# EAGLE board CT_schematic (EAGLE 7.6.0)

Size 100 x 80 mm. Coordinates in mm from the lower left corner, seen from the top.
Outline: 0,0 100,0 100,80 0,80 0,0
Copper layers (1*16): Top 0.035mm / dielectric 1.5mm / Bottom 0.035mm
Design rules "default": minimum track width 10mil, minimum drill 24mil, track to track 8mil, track to pad 8mil, pad to pad 8mil, via to via 8mil, smd to smd 8mil, copper to edge 40mil, drill to drill 8mil, minimum pad ring 10mil, minimum via ring 8mil, stop-mask expansion 4mil, vias tented up to drill 0mil, thermal gap 10mil

## Footprints (pad centres in the part's own frame; a part is rotated, then mirrored left to right if it is on the bottom)
C0603 = smd 0.8 x 0.8: 1 -0.762,0; 2 0.762,0
C0402 = smd 0.5 x 0.5: 1 -0.508,0; 2 0.508,0
C1210 = smd 1.2 x 2.5: 1 -1.524,0; 2 1.524,0
EXV-9H = smd 3.505 x 1.676: 1 -2.857,0; 2 2.857,0
L0603 = smd 0.8 x 0.8: 1 -0.762,0; 2 0.762,0
PJ-037B_PACKAGE = drill 3.7 square: 1 12,0 | drill 3.2 square: 2 6,0
R0603 = smd 0.8 x 0.8: 1 -0.762,0; 2 0.762,0
LQFP48 = smd 0.3 x 1.2: 1 -2.75,-4.25; 2 -2.25,-4.25; 3 -1.75,-4.25; 4 -1.25,-4.25; 5 -0.75,-4.25; 6 -0.25,-4.25; 7 0.25,-4.25; 8 0.75,-4.25; 9 1.25,-4.25; 10 1.75,-4.25; 11 2.25,-4.25; 12 2.75,-4.25; 25 2.75,4.25; 26 2.25,4.25; 27 1.75,4.25; 28 1.25,4.25; 29 0.75,4.25; 30 0.25,4.25; 31 -0.25,4.25; 32 -0.75,4.25; 33 -1.25,4.25; 34 -1.75,4.25; 35 -2.25,4.25; 36 -2.75,4.25 | smd 1.2 x 0.3: 13 4.25,-2.75; 14 4.25,-2.25; 15 4.25,-1.75; 16 4.25,-1.25; 17 4.25,-0.75; 18 4.25,-0.25; 19 4.25,0.25; 20 4.25,0.75; 21 4.25,1.25; 22 4.25,1.75; 23 4.25,2.25; 24 4.25,2.75; 37 -4.25,2.75; 38 -4.25,2.25; 39 -4.25,1.75; 40 -4.25,1.25; 41 -4.25,0.75; 42 -4.25,0.25; 43 -4.25,-0.25; 44 -4.25,-0.75; 45 -4.25,-1.25; 46 -4.25,-1.75; 47 -4.25,-2.25; 48 -4.25,-2.75
TSC2014IYZGT = smd 0.3 x 0.3: A1 0,0; A2 0.5,0; A3 1,0; B1 0,-0.5; B2 0.5,-0.5; B3 1,-0.5; C1 0,-1; C2 0.5,-1; C3 1,-1; D1 0,-1.5; D2 0.5,-1.5; D3 1,-1.5
HTSS-105-01-G-D = drill 1 pad 1.8 square: 1 0,0 | drill 1 pad 1.8: 2 0,2.54; 3 2.54,0; 4 2.54,2.54; 5 5.08,0; 6 5.08,2.54; 7 7.62,0; 8 7.62,2.54; 9 10.16,0; 10 10.16,2.54
ABLS-25.000MHZ-B2F-T = smd 5.6 x 2.8: 1 -3.81,0; 2 5.69,0
ASEK = smd 1.4 x 1: 1 -1.1,-0.8; 2 1.1,-0.8; 3 1.1,0.8; 4 -1.1,0.8
SOIC-8_EP = smd 1.6 x 0.533: 1 -2.921,1.905; 2 -2.921,0.635; 3 -2.921,-0.635; 4 -2.921,-1.905; 5 2.921,-1.905; 6 2.921,-0.635; 7 2.921,0.635; 8 2.921,1.905 | smd 2.54 x 3.302: EPAD 0,0 | drill 0.406 pad 0.406: P$1 -0.508,0.635; P$2 0.381,0.635; P$3 -0.508,-0.635; P$4 0.381,-0.635
SON-6 = smd 0.55 x 0.3: 1 -0.355,0.5 | smd 0.52 x 0.3: 2 -0.37,0; 3 -0.37,-0.5; 4 0.37,-0.5; 5 0.37,0; 6 0.37,0.5
SW_4-1437565-2 = smd 1.4 x 2.1: 1 -2.23,4.55; 2 -2.23,-4.55; 3 2.23,4.55; 4 2.23,-4.55
LGM67K-G1J2-24-Z = smd 0.8 x 1.4: A -2,0; C 0,0
NC7SZ125M5X = smd 1.3 x 0.7: 1 -1.3,0.95; 2 -1.3,0; 3 -1.3,-0.95; 4 1.3,-0.95; 5 1.3,0.95

## Placement (x,y rotation side)
C1  1e-07  [C0603]  -19.05,54.61 0 top  (outside the outline)
C2  1e-07  [C0603]  -22.86,54.61 0 top  (outside the outline)
C3  1e-07  [C0603]  -26.67,54.61 0 top  (outside the outline)
C4  1e-07  [C0603]  -30.48,54.61 0 top  (outside the outline)
C5  4.7e-06  [C0603]  -15.24,54.61 0 top  (outside the outline)
C6  1e-07  [C0603]  -34.29,54.61 0 top  (outside the outline)
C7  1e-08  [C0603]  -38.1,54.61 0 top  (outside the outline)
C8  1e-06  [C0603]  -41.91,54.61 0 top  (outside the outline)
C9  1e-07  [C0603]  -45.72,54.61 0 top  (outside the outline)
C10  1e-11  [C0402]  -38.1,59.69 0 top  (outside the outline)
C11  1e-11  [C0402]  -41.91,59.69 0 top  (outside the outline)
C12  1e-07  [C0402]  -45.72,59.69 0 top  (outside the outline)
C13  1e-06  [C0603]  -49.53,54.61 0 top  (outside the outline)
C14  1e-08  [C0402]  -49.53,59.69 0 top  (outside the outline)
C15  1e-05  [C1210]  -29.21,43.18 0 top  (outside the outline)
C16  1e-05  [C1210]  -35.56,43.18 0 top  (outside the outline)
C17  1e-05  [C1210]  -41.91,43.18 0 top  (outside the outline)
C18  1e-05  [C1210]  -48.26,43.18 0 top  (outside the outline)
C19  1e-07  [C0402]  -53.34,59.69 0 top  (outside the outline)
C20  0.0001  [EXV-9H]  -38.1,29.21 0 top  (outside the outline)
C21  0.0001  [EXV-9H]  -49.53,29.21 0 top  (outside the outline)
C22  1e-08  [C0402]  -57.15,59.69 0 top  (outside the outline)
F1  240.0  [L0603]  -53.34,54.61 0 top  (outside the outline)
J1  PJ-037B  [PJ-037B_PACKAGE]  -27.94,7.62 0 top  (outside the outline)
R1  10000.0  [R0603]  -34.29,49.53 0 top  (outside the outline)
R2  1000.0  [R0603]  -57.15,54.61 0 top  (outside the outline)
R3  1600.5  [R0603]  -15.24,59.69 0 top  (outside the outline)
R4  4700.0  [R0603]  -19.05,59.69 0 top  (outside the outline)
R5  2200.0  [R0603]  -22.86,59.69 0 top  (outside the outline)
R6  2200.0  [R0603]  -26.67,59.69 0 top  (outside the outline)
R7  10000.0  [R0603]  -39.37,49.53 0 top  (outside the outline)
R8  10000.0  [R0603]  -44.45,49.53 0 top  (outside the outline)
R9  10000.0  [R0603]  -49.53,49.53 0 top  (outside the outline)
R10  4031.5447154472  [R0603]  -19.05,49.53 0 top  (outside the outline)
R11  2200.0  [R0603]  -30.48,59.69 0 top  (outside the outline)
R12  10000.0  [R0603]  -54.61,49.53 0 top  (outside the outline)
R13  10000.0  [R0603]  -59.69,49.53 0 top  (outside the outline)
R14  9100.0  [R0603]  -34.29,59.69 0 top  (outside the outline)
R15  680000.0  [R0603]  -24.13,49.53 0 top  (outside the outline)
R16  120000.0  [R0603]  -29.21,49.53 0 top  (outside the outline)
U1  STM32L083CZT6  [LQFP48]  -24.13,20.32 0 top  (outside the outline)
U2  TSC2014IYZGT  [TSC2014IYZGT]  -24.13,44.45 0 top  (outside the outline)
U3  HTSS-105-01-G-D  [HTSS-105-01-G-D]  -44.45,19.05 0 top  (outside the outline)
U4  ABLS-25.000MHZ-B2F-T  [ABLS-25.000MHZ-B2F-T]  -26.67,36.83 0 top  (outside the outline)
U5  ASEK-32.768KHz-ECST  [ASEK]  -29.21,29.21 0 top  (outside the outline)
U6  MIC5234YME  [SOIC-8_EP]  -38.1,35.56 0 top  (outside the outline)
U7  TPS3895ADRYR  [SON-6]  -13.97,63.5 0 top  (outside the outline)
U8  4-1437565-2  [SW_4-1437565-2]  -44.45,6.35 0 top  (outside the outline)
U9  Q65110A2395  [LGM67K-G1J2-24-Z]  -46.99,36.83 0 top  (outside the outline)
U10  nc7sz125m5x  [NC7SZ125M5X]  -53.34,43.18 0 top  (outside the outline)

## Library data of the parts
C1-C22 F1 J1 R1-R16 U1-U10 = circuit_tree

## Nets
CLK_CRYSTAL_U1_5: C10.1 U1.5 U4.1
CLK_CRYSTAL_U1_6: C11.1 U1.6 U4.2
CLK_U1_3: U1.3 U5.3
GND: C1.2 C2.2 C3.2 C4.2 C5.2 C6.2 C7.2 C8.2 C9.2 C10.2 C11.2 C12.2 C13.2 C14.2 C15.2 C16.2 C17.2 C18.2 C19.2 C20.2 C21.2 C22.2 J1.2 R2.2 R7.2 R11.2 R14.2 R16.2 U1.8 U1.23 U1.35 U1.47 U2.D2 U3.9 U5.2 U6.7 U6.EPAD U7.2 U9.C U10.1 U10.3
NET_U1_1: C6.1 U1.1
NET_U1_7: R4.1 U1.7 U10.4
NET_U1_9: C7.1 C8.1 F1.1 U1.9
NET_U1_30: R5.1 U1.30 U2.D1
NET_U1_31: R6.1 U1.31 U2.C1
NET_U1_44: R7.1 U1.44
NET_U1_45: R3.1 U1.45 U9.A
NET_U1_46: R1.1 U1.46 U8.3 U8.4
NET_U2_B1: R9.1 U2.B1
NET_U2_C2: R8.1 U2.C2
NET_U3_3: U2.B3 U3.3
NET_U3_4: U2.D3 U3.4
NET_U3_5: U2.A3 U3.5
NET_U3_6: U2.C3 U3.6
NET_U6_4: R10.2 R11.1 U6.4
NET_U7_1: R13.1 R14.1 U7.1
NET_U7_3: R15.2 R16.1 U7.3
NET_U7_4: R12.1 U7.4 U10.2
NET_U8_1: R2.1 U8.1 U8.2
VCC_S1_14V6: C15.1 C16.1 C20.1 C21.1 J1.1 U6.5 U6.8
VCC_TIER1_3V3: C1.1 C2.1 C3.1 C4.1 C5.1 C9.1 C12.1 C13.1 C14.1 C17.1 C18.1 C19.1 C22.1 F1.2 R1.2 R3.2 R4.2 R5.2 R6.2 R8.2 R9.2 R10.1 R12.2 R13.2 R15.1 U1.24 U1.36 U1.48 U2.A2 U2.B2 U5.4 U6.1 U7.6 U10.5

## Tracks (layer width: path | path; a pad name or v marks a point on that pad's centre or on a via)
CLK_CRYSTAL_U1_5  (2 unrouted)
CLK_CRYSTAL_U1_6  (2 unrouted)
CLK_U1_3  (1 unrouted)
GND  (40 unrouted)
NET_U1_1  (1 unrouted)
NET_U1_7  (2 unrouted)
NET_U1_9  (3 unrouted)
NET_U1_30  (2 unrouted)
NET_U1_31  (2 unrouted)
NET_U1_44  (1 unrouted)
NET_U1_45  (2 unrouted)
NET_U1_46  (3 unrouted)
NET_U2_B1  (1 unrouted)
NET_U2_C2  (1 unrouted)
NET_U3_3  (1 unrouted)
NET_U3_4  (1 unrouted)
NET_U3_5  (1 unrouted)
NET_U3_6  (1 unrouted)
NET_U6_4  (2 unrouted)
NET_U7_1  (2 unrouted)
NET_U7_3  (2 unrouted)
NET_U7_4  (2 unrouted)
NET_U8_1  (2 unrouted)
VCC_S1_14V6  (6 unrouted)
VCC_TIER1_3V3  (33 unrouted)